# EAGLE board plant (EAGLE 9.6.1)
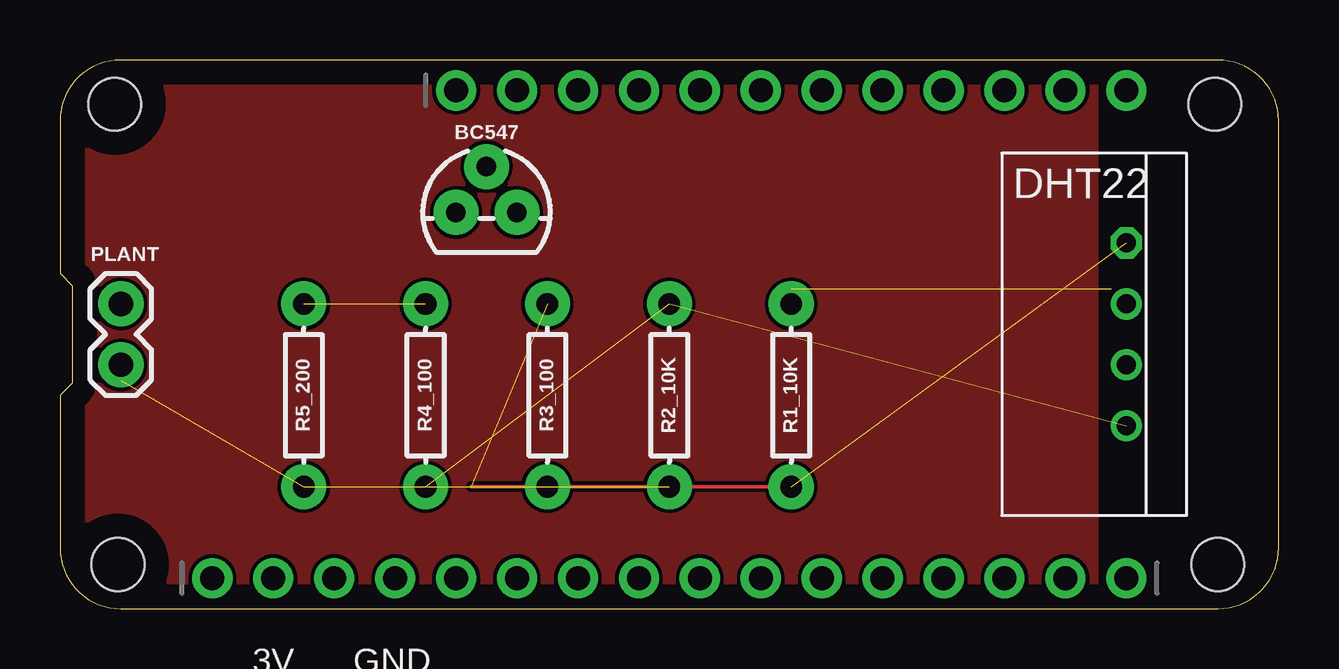
[diagram p0: board, top side]
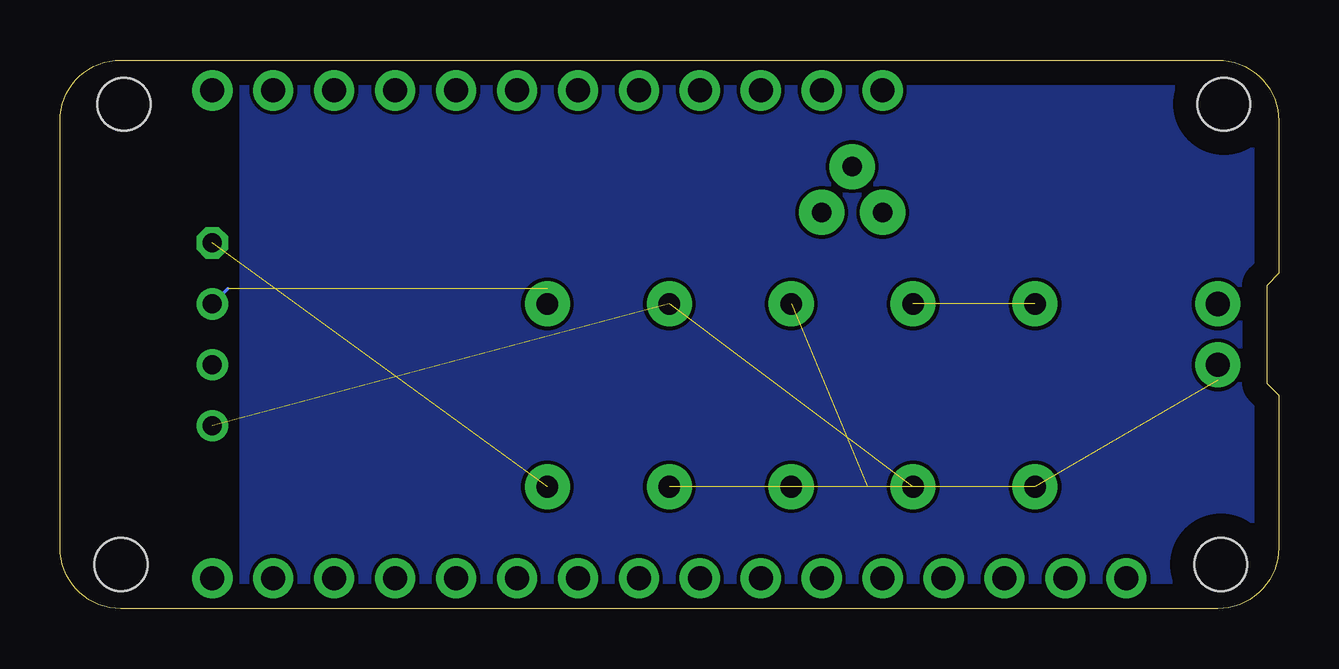
[diagram p1: board, bottom side, seen from below]

Size 50.8 x 22.86 mm. Coordinates in mm from the lower left corner, seen from the top.
Outline: 2.54,0 48.26,0 arc90 50.8,2.54 50.8,20.32 arc90 48.26,22.86 2.54,22.86 arc90 0,20.32 0,13.97 0.51,13.46 0.51,9.4 0,8.89 0,2.54 arc90 2.54,0
Copper layers (1*16): Top 0.035mm / dielectric 1.5mm / Bottom 0.035mm
Design rules "default": minimum track width 6mil, minimum drill 0.35mm, track to track 6mil, track to pad 6mil, pad to pad 6mil, via to via 6mil, smd to smd 6mil, copper to edge 40mil, drill to drill 6mil, minimum pad ring 10mil, minimum via ring 8mil, stop-mask expansion 4mil, vias tented up to drill 0mil, thermal gap 10mil
Holes 2.2 mm at 48.26,1.84 48.13,21.02 2.41,1.84 2.29,21.02

## Footprints (pad centres in the part's own frame; a part is rotated, then mirrored left to right if it is on the bottom)
TO-92 = drill 0.813 pad 1.88: 1 -1.27,0; 2 0,1.905; 3 1.27,0
RHT03_DHT-22 = drill 0.8: DATA -1.27,0; GND 3.81,0; NULL 1.27,0 | drill 0.8 octagon: VDD -3.81,0
1X16_ROUND = drill 1 pad 1.676: 1 -19.05,0; 2 -16.51,0; 3 -13.97,0; 4 -11.43,0; 5 -8.89,0; 6 -6.35,0; 7 -3.81,0; 8 -1.27,0; 9 1.27,0; 10 3.81,0; 11 6.35,0; 12 8.89,0; 13 11.43,0; 14 13.97,0; 15 16.51,0; 16 19.05,0
1X12_ROUND = drill 1 pad 1.676: 1 -13.97,0; 2 -11.43,0; 3 -8.89,0; 4 -6.35,0; 5 -3.81,0; 6 -1.27,0; 7 1.27,0; 8 3.81,0; 9 6.35,0; 10 8.89,0; 11 11.43,0; 12 13.97,0
1X02 = drill 1.016 pad 1.88: 1 0,0; 2 2.54,0
AXIAL-0.3 = drill 0.9 pad 1.88: P$1 -3.81,0; P$2 3.81,0

## Placement (x,y rotation side)
BC547  200mA/40V  [TO-92]  17.78,16.51 0 top
DHT22  [RHT03_DHT-22]  44.45,11.43 270 top
JP1  [1X16_ROUND]  25.4,1.27 0 top
JP3  [1X12_ROUND]  30.48,21.59 0 top
JP5  [1X16_ROUND]  25.4,1.27 180 top
JP6  [1X12_ROUND]  30.48,21.59 0 top
PLANT  [1X02]  2.54,10.16 90 top
R1_10K  10k  [AXIAL-0.3]  30.48,8.89 90 top
R2_10K  10k  [AXIAL-0.3]  25.4,8.89 90 top
R3_100  100  [AXIAL-0.3]  20.32,8.89 90 top
R4_100  100  [AXIAL-0.3]  15.24,8.89 90 top
R5_200  [AXIAL-0.3]  10.16,8.89 270 top

## Library data of the parts
BC547 = SparkFun-DiscreteSemi; PROD_ID: TRANS-08447
DHT22 = RHT03_DHT-22_AM2302; PROD_ID: SEN-10167
JP1 JP3 JP5 JP6 = microbuilder
PLANT = SparkFun-Connectors
R1_10K R2_10K = SparkFun-Resistors; PROD_ID: RES-12183
R3_100 R4_100 = SparkFun-Resistors; PROD_ID: RES-12181
R5_200 = SparkFun-Resistors

## Nets
N$1: BC547.2
N$2: DHT22.DATA R1_10K.P$2
N$4: PLANT.2
N$5: R4_100.P$2 R5_200.P$1
N$6: DHT22.GND R2_10K.P$2 R4_100.P$1
N$7: PLANT.1 R2_10K.P$1 R5_200.P$2
N$8: DHT22.VDD R1_10K.P$1 R3_100.P$2

## Tracks (layer width: path | path; a pad name or v marks a point on that pad's centre or on a via)
GND2
  pour Top: 0,22.86 0,0 43.18,0 43.18,22.86
  pour Bottom: -0.13,0.25 43.18,0 43.18,22.86 0,22.86
N$2  (1 unrouted)
  Bottom 0.152: 43.81,13.34 DHT22.DATA | R1_10K.P$2 30.48,13.34
N$5  (1 unrouted)
N$6  (2 unrouted)
N$7  (2 unrouted)
  Top 0.152: PLANT.1 2.54,9.53
N$8  (2 unrouted)
  Top 0.152: R1_10K.P$1 17.14,5.08

## Text on the board
tPlace: 3V | GND